# Altium PCB tank_adapter.PcbDoc
Units mil, origin at the board's own origin, x right, y up, seen from the top; angles counter-clockwise.
Board outline 3730 x 2775 mil, 2 copper layers (Top Layer, Bottom Layer); 34 components, 32 nets, 171 pads, 9 vias.
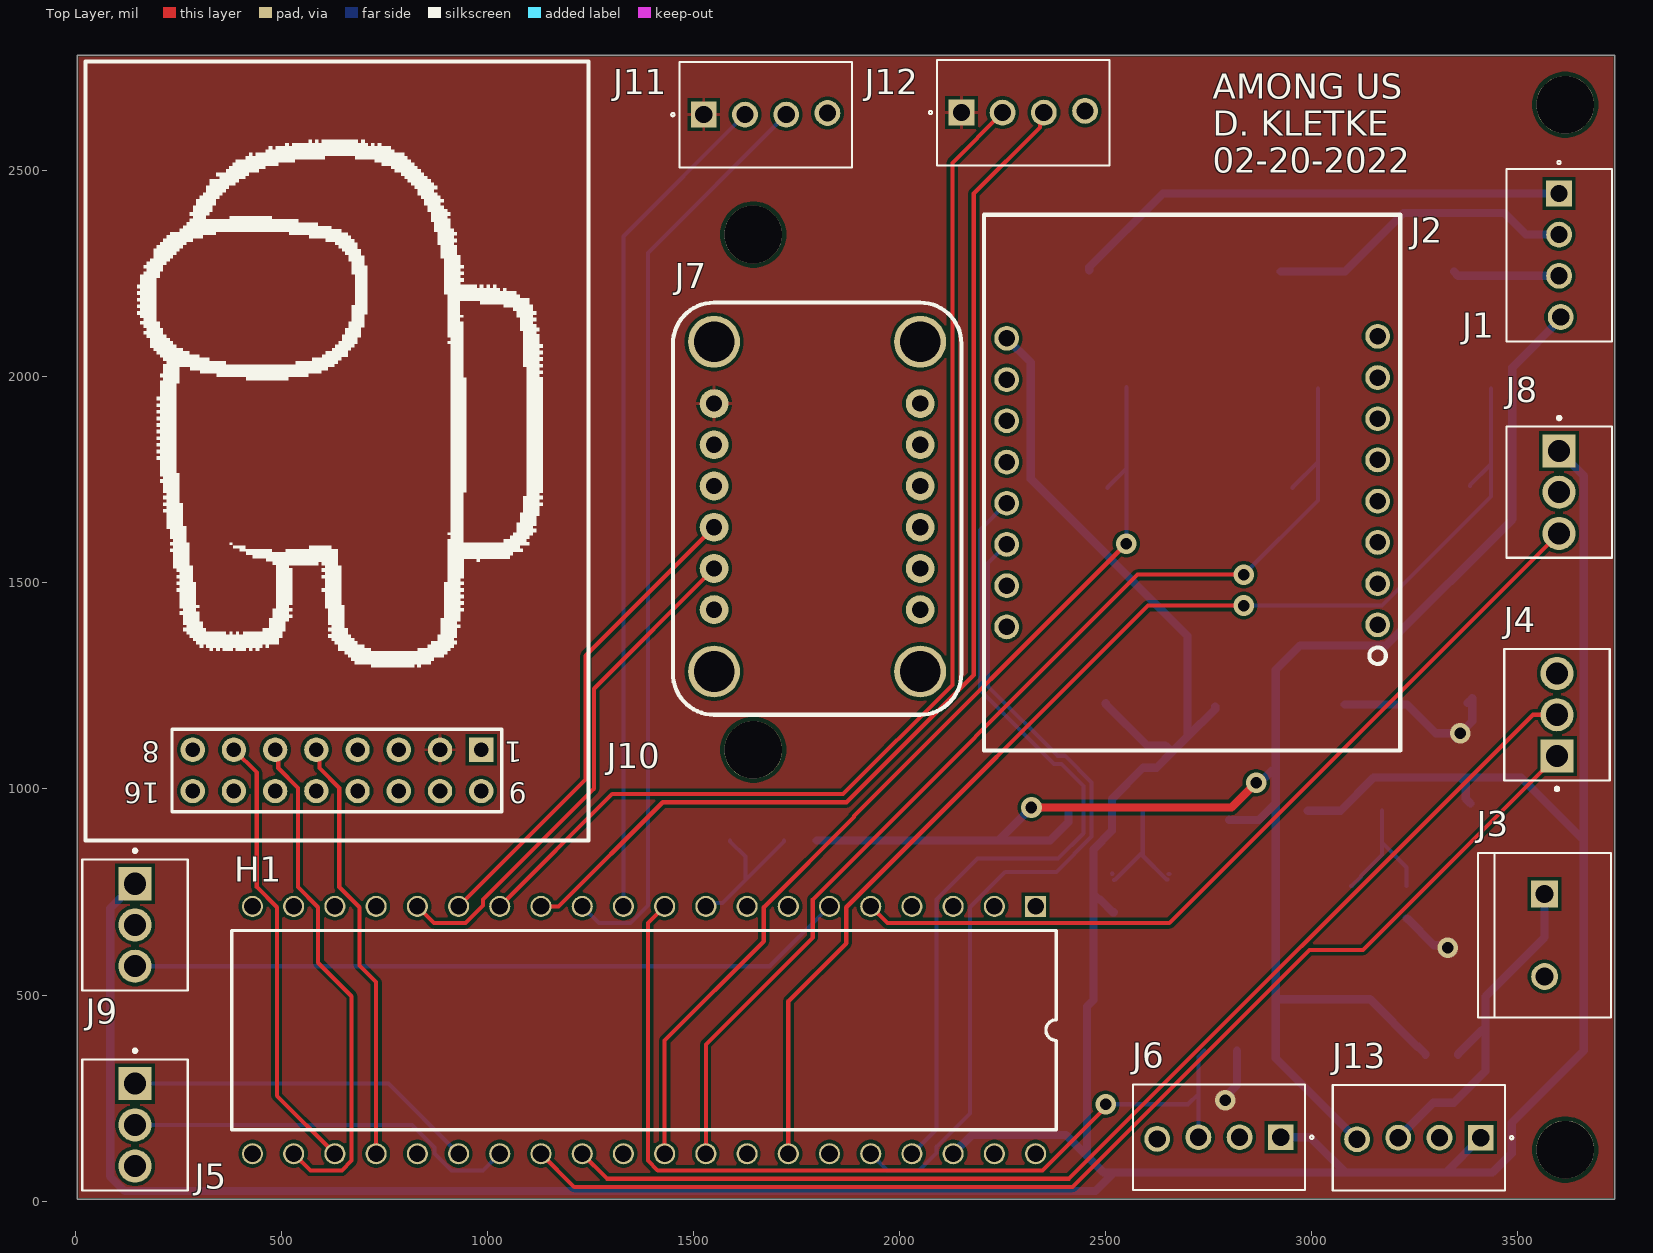
[diagram p0: Top Layer view]
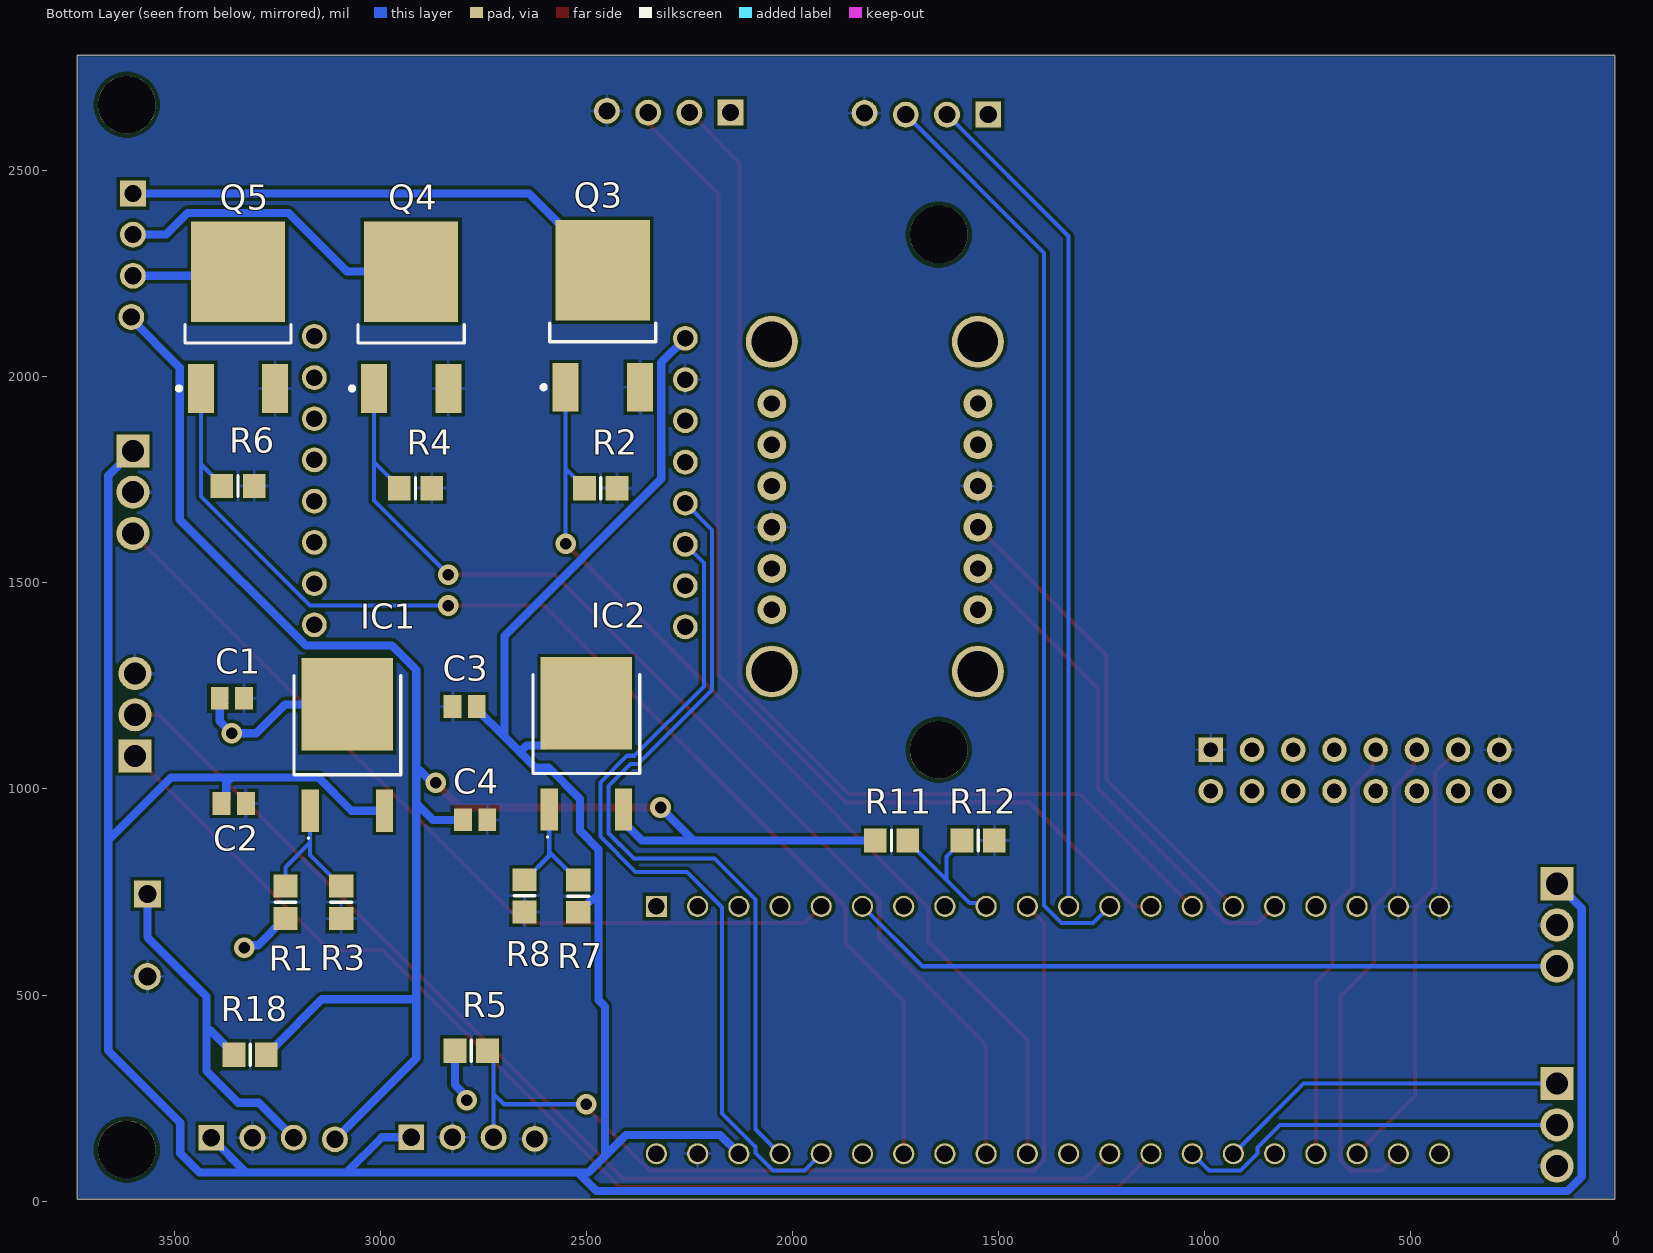
[diagram p1: Bottom Layer view, seen from below]

## Layer stack, top to bottom
Top Solder: solder mask 0.4, Solder Resist, Dk 3.5
Top Layer: signal copper 1.4
Dielectric 1: dielectric 12.6, FR-4, Dk 4.8
Bottom Layer: signal copper 1.4
Bottom Solder: solder mask 0.4, Solder Resist, Dk 3.5

## Board outline
5,5 3735,5 3735,2780 5,2780

## Design rules (kind name [scope] priority, off if disabled: settings)
BoardOutlineClearance [All] p1: gap=7.87 ignorepadtopadclearanceinfootprint=FALSE
Clearance [All] p1: gap=8 ignorepadtopadclearanceinfootprint=FALSE except(9.84: Arc-Hole Track-Hole SMDPad-Hole THPad-Hole Via-Hole Fill-Hole Poly-Hole Region-Hole Text-Hole)
ComponentClearance [All] p1: gap=5 collisioncheckmode=3 verticalgap=5 showdistances=TRUE
DiffPairsRouting [All] p1: maxlimit=15 minlimit=8 mostfreqgap=8 toplayer_minwidth=8 toplayer_maxwidth=1000 toplayer_prefwidth=8 bottomlayer_minwidth=8 bottomlayer_maxwidth=1000 bottomlayer_prefwidth=8 maxuncoupledlength=500
Height [All] p1: minheight=0 maxheight=71497.94 prefheight=500
HoleSize [All] p1: absolutevalues=TRUE maxlimit=248.03 minlimit=11.81 maxpercent=80.000 minpercent=20.000
HoleToHoleClearance [All] p1: gap=9.84 allowstackedmicrovias=FALSE
MinimumAnnularRing [All] p1: minimumring=3
MinimumSolderMaskSliver [All] p1: minsoldermaskwidth=0
PlaneClearance [All] p1: clearance=8
PlaneConnect PlaneConnectPowerPads [InPadClass('PowerPads')] p1: planeconnectstyle=Direct reliefexpansion=20 reliefentries=4 reliefconductorwidth=10 reliefairgap=10
PlaneConnect [All] p2: pad.planeconnectstyle=Relief pad.reliefexpansion=11.81 pad.reliefentries=4 pad.reliefconductorwidth=8 pad.reliefairgap=8 via.planeconnectstyle=Direct via.reliefexpansion=11.81 via.reliefentries=4 via.reliefconductorwidth=5 via.reliefairgap=5
PolygonConnect PolygonConnectPowerPads [All vs (InPadClass('PowerPads'))] p1: connectstyle=Direct reliefconductorwidth=10 reliefentries=4 polygonreliefangle="90 Angle" airgapwidth=10
PolygonConnect [All] p2: thpad.connectstyle=Relief thpad.reliefconductorwidth=8 thpad.reliefentries=4 thpad.polygonreliefangle="90 Angle" thpad.airgapwidth=8 smdpad.connectstyle=Relief smdpad.reliefconductorwidth=8 smdpad.reliefentries=4 smdpad.polygonreliefangle="90 Angle" smdpad.airgapwidth=8 via.connectstyle=Direct via.reliefconductorwidth=5 via.reliefentries=4 via.polygonreliefangle="90 Angle" via.airgapwidth=5
RoutingVias [All] p1: holewidth=11.81 width=23.62 viastyle="Through Hole" minholewidth=11.81 minwidth=23.62 maxholewidth=23.62 maxwidth=259.84
SilkToSilkClearance [All] p1: silktosilkclearance=0
SilkToSolderMaskClearance [IsPad] p1: minsilkscreentomaskgap=5 clearancetoexposedcopper=TRUE
SolderMaskExpansion [All] p1: expansion=2.95 istentingtop=FALSE
Width [All] p1: maxlimit=1000 minlimit=8 preferedwidth=8 minimp=50.000000 maximp=50.000000 favimp=50.000000
20 further rules are at their usual default settings.

## Classes and differential pairs
component class tank_adapter: H1 J1 J2 J3 J4 J5 J6 J7 J8 J9 J10 J11 J12 J13 Q3 Q4 Q5 R2 R4 R5 R6 R18
component class tank_adapter_power: C1 C2 C3 C4 IC1 IC2 R1 R3 R7 R8 R11 R12

## Components (designator, comment, footprint, x,y, rotation, side; value= is the part's Value field where it differs from the comment)
C1 "Cap" C0805 3360,1220 r0 bottom value=22uF
C2 "Cap" C0805 3355.47,965 r0 bottom value=10uF
C3 "Cap" C0805 2795.47,1200 r180 bottom value=22uF
C4 "Cap" C0805 2770,925 r0 bottom value=10uF
H1 "STM32 Bluepill" "STM32 Bluepill" 2330,715 r270 top
IC1 "AZ1084CD-ADJTRG1" AZ1084CDADJTRG1 3080,1110.91 r180 bottom
IC2 "AZ1084CD-ADJTRG1" AZ1084CDADJTRG1 2500,1113.78 r180 bottom
J1 "LEDs" HDRV4W85P254_4X1_1062X650X1000 3600,2445 r270 top
J2 "ESP8266MOD D1 MINI" "ESP8266MOD D1 MINI" 3159.84,1398.23 r180 top
J3 "LiPo Battery" TE_282837-2 3565,645 r270 top
J4 "Motor Encoder LEFT" TE_282834-3 3595,1080 r90 top
J5 "Motor Encoder RIGHT" TE_282834-3 145,285 r270 top
J6 "Programming Switch" HDRV4W85P254_4X1_1062X650X1000 2925,155 r180 top
J7 "ICM-20948 Breakout 2x6 Pin Header" "ICM20948 Breakout" 1993,2180 r270 top
J8 "Motor ESC LEFT" TE_282834-3 3600,1820 r270 top
J9 "Motor ESC RIGHT" TE_282834-3 145,770 r270 top
J10 "LC Studio" HDR2X8_CEN 985,1095 r180 top locked
J11 "HC-SR04 Ultrasonic Sensor FRONT" HDRV4W85P254_4X1_1062X650X1000 1525,2636.06 r0 top
J12 "HC-SR04 Ultrasonic Sensor SIDE" HDRV4W85P254_4X1_1062X650X1000 2150,2641.06 r0 top
J13 "Power Switch" HDRV4W85P254_4X1_1062X650X1000 3410,153.94 r180 top
Q3 "NTD14N03RT4G" ONSC-DPAK-3-369C-01_V 2460.16,2147.99 r90 bottom
Q4 "NTD14N03RT4G" ONSC-DPAK-3-369C-01_V 2925,2145 r90 bottom
Q5 "NTD14N03RT4G" ONSC-DPAK-3-369C-01_V 3345,2145 r90 bottom
R1 "Res1" 6-0805_M 3230,725 r270 bottom value=150
R2 "Res1" 6-0805_M 2465,1730 r180 bottom value=10k
R3 "Res1" 6-0805_M 3095,725 r90 bottom value=250
R4 "Res1" 6-0805_M 2914.37,1730 r180 bottom value=10k
R5 "Res1" 6-0805_M 2779.37,365 r180 bottom value=10k
R6 "Res1" 6-0805_M 3345,1735 r180 bottom value=10k
R7 "Res1" 6-0805_M 2520,740 r270 bottom value=150
R8 "Res1" 6-0805_M 2650,740.63 r90 bottom value=450
R11 "Res1" 6-0805_M 1759.37,875 r0 bottom value=150k
R12 "Res1" 6-0805_M 1549.37,875 r0 bottom value=50k
R18 "Res1" 6-0805_M 3315.63,355 r180 bottom value=0

## Footprints (in the part's own frame and the unit in brackets; to place one, negate y for a bottom-side part, rotate by r counter-clockwise, add the part's x,y. Pads: shape width x height; smd on the part's side, far side on the other; paste and mask are expansions set on the pad)
6-0805_M [mm] "Chip Resistor, Body 2.0x1.2mm, IPC Low Density"
  rect 1.4x1.5 smd: 1(-1,0) 2(1,0)
  silkscreen extent 0,-0.65 0,0.65, body extent -1.07,-0.7 1.07,0.7, height 0.7
AZ1084CDADJTRG1 [mm]
  rect 1.06x2.6 smd: 1(-2.286,-4.16) 3(2.286,-4.16)
  rect 5.632x5.7 smd: 2(0,2.39)
  silkscreen extent -3.29,-5.9 3.29,4.16
C0805 [mm] "Chip Capacitor, Body 2.0x1.3mm, IPC High Density"
  rect 1.1x1.4 smd: 1(-0.75,0) 2(0.75,0)
  body extent -1.1,-0.72 1.1,0.72, height 1.4
"ESP8266MOD D1 MINI" [mil] "ESP8266MOD D1 MINI Wi-Fi Module"
  round 60 hole 40: 1(0,0) 2(0,-100) 3(0,-200) 4(0,-300) 5(0,-400) 6(0,-500) 7(0,-600) 8(0,-700) 9(900,-695) 10(900,-595) 11(900,-495) 12(900,-395) 13(900,-295) 14(900,-195) 15(900,-95) 16(900,5)
  silkscreen extent -55,-995 955,305
HDR2X8_CEN [mm] "Connector; Header; 8x2 Position"
  rect 1.5x1.5 hole 0.9: 1(0,0)
  round 1.5 hole 0.9: 2(2.54,0) 3(5.08,0) 4(7.62,0) 5(10.16,0) 6(12.7,0) 7(15.24,0) 8(17.78,0) 9(0,2.54) 10(2.54,2.54) 11(5.08,2.54) 12(7.62,2.54) 13(10.16,2.54) 14(12.7,2.54) 15(15.24,2.54) 16(17.78,2.54)
  silkscreen extent -1.27,-1.27 19.05,3.81
HDRV4W85P254_4X1_1062X650X1000 [mm]
  rect 1.59x1.59 hole 1.06: 1(0,0)
  round 1.59 hole 1.06: 2(2.54,0) 3(5.08,0) 4(7.62,0.1)
  silkscreen extent -2,-3.25 9.12,3.25
"ICM20948 Breakout" [mil] "ICM20948 Breakout Footprint"
  round 70 hole 39.37: 1(245,-443) 2(345,-443) 3(445,-443) 4(545,-443) 5(645,-443) 6(745,-443) 7(745,57) 8(645,57) 9(545,57) 10(445,57) 11(345,57) 12(245,57)
  round 125.98 hole 98.43: P$1(95,57) P$1(95,-443) P$1(895,57) P$1(895,-443)
  silkscreen extent 0,-543 1000,157
ONSC-DPAK-3-369C-01_V [mm] "DPAK, 3-Leads, Body 6.54x6.095mm, Pitch 2.29mm"
  rect 3x1.6 smd: 1(-4.4,2.29) 3(-4.4,-2.29)
  rect 6.2x5.8 smd: 4(2.8,0)
  silkscreen extent -4.52,-3.27 -0.45,3.77, body extent -1.6,-3.27 4.49,3.27, height 2.38
"STM32 Bluepill" [mm]
  rect 1.3x1.3 hole 1.02: 1(0,0)
  round 1.3 hole 1.02: 2(0,-2.54) 3(0,-5.08) 4(0,-7.62) 5(0,-10.16) 6(0,-12.7) 7(0,-15.24) 8(0,-17.78) 9(0,-20.32) 10(0,-22.86) 11(0,-25.4) 12(0,-27.94) 13(0,-30.48) 14(0,-33.02) 15(0,-35.56) 16(0,-38.1) 17(0,-40.64) 18(0,-43.18) 19(0,-45.72) 20(0,-48.26) 21(15.24,-48.26) 22(15.24,-45.72) 23(15.24,-43.18) 24(15.24,-40.64) 25(15.24,-38.1) 26(15.24,-35.56) 27(15.24,-33.02) 28(15.24,-30.48) 29(15.24,-27.94) 30(15.24,-25.4) 31(15.24,-22.86) 32(15.24,-20.32) 33(15.24,-17.78) 34(15.24,-15.24) 35(15.24,-12.7) 36(15.24,-10.16) 37(15.24,-7.62) 38(15.24,-5.08) 39(15.24,-2.54) 40(15.24,0)
  silkscreen extent 1.48,-49.53 13.76,1.27
TE_282834-3 [mm]
  rect 2.04x2.04 hole 1.36: 1(0,0)
  round 2.04 hole 1.36: 2(2.54,0) 3(5.08,0)
  silkscreen extent -2.13,-3.25 6.58,3.25, body extent -1.5,-3.2 6.58,3.3, height 7
TE_282837-2 [mm]
  rect 1.65x1.65 hole 1.1: 1(-2.54,0)
  round 1.65 hole 1.1: 2(2.54,0)
  silkscreen extent -5.08,-4.1 5.08,4.1, body extent -5.33,-3.88 5.43,4.32, height 7.25

## Part data
C1 C2 C3 C4: "Capacitor", LatestRevisionDate=17-Jul-2002, LatestRevisionNote="Re-released for DXP Platform.", PackageDescription="Radial Cap, Thru-Hole; 2 Leads; 0.3 in Pin Spacing", PackageReference=RAD-0.3, Published=8-Jun-2000, Publisher="Altium Limited"
IC1 IC2: "Integrated Circuit", Manufacturer_Name="Diodes Inc.", Mouser2 Part Number=621-AZ1084CD-ADJTRG1, Datasheet Link=https://componentsearchengine.com//AZ1084CD-ADJTRG1.pdf, Height=2.39mm, Manufacturer_Part_Number=AZ1084CD-ADJTRG1, Mouser2 Price/Stock=https://www.mouser.com/Search/Refine.aspx?Keyword=621-AZ1084CD-ADJTRG1
J1 J6 J11 J12 J13: library part 282834-4, "4 Position Wire to Board Terminal Block Horizontal with Board 0.100 _2.54mm_ Through Hole", Package=None, Availability=Unavailable, Centerline_Pitch="2.54 mm[.1 in]", EU_RoHS_Compliance="Compliant with Exemptions", MF="TE Connectivity", MP=282834-4, Number_of_Positions=4, Price=None, SnapEDA_Link=https://www.snapeda.com/parts/282834-4/TE%20Connectivity%20AMP%20Connectors/view-part/448422/?ref=snap, TE_purchase_URL=https://www.te.com/usa-en/product-282834-4.html?te_bu=Cor&te_type=disp&te_campaign=seda_glo_cor-seda-global-disp-prtnr-fy19-seda-model-bom-cta_sma-317_1&elqCampaignId=32493
J3: library part 282837-2, "Connector Terminal Blocks Receptacle 2 Position 5.08mm Solder Straight Thru-Hole 13.5A/Contact", Package=None, Availability=Good, Check_prices=https://www.snapeda.com/parts/282837-2/TE%20Connectivity%20AMP%20Connectors/view-part/2549980/?ref=eda, MF="TE Connectivity", MP=282837-2, Price=None, Purchase-URL=https://pricing.snapeda.com/search/part/282837-2/?ref=eda, SnapEDA_Link=https://www.snapeda.com/parts/282837-2/TE%20Connectivity%20AMP%20Connectors/view-part/2549980/?ref=snap
J4 J5 J8 J9: library part 282834-3, "3 Position Wire to Board Terminal Block Horizontal with Board 0.100 (2.54mm)", Package=None, Availability=Good, Check_prices=https://www.snapeda.com/parts/282834-3/TE%20Connectivity%20AMP%20Connectors/view-part/398089/?ref=eda, EU_RoHS_Compliance="Compliant with Exemptions", MF="TE Connectivity", MP=282834-3, Price=None, Purchase-URL=https://pricing.snapeda.com/search/part/282834-3/?ref=eda, SnapEDA_Link=https://www.snapeda.com/parts/282834-3/TE%20Connectivity%20AMP%20Connectors/view-part/398089/?ref=snap
J7: "THT Vertical Pin Header WR-PHD, Pitch 2.54 mm, Double Row, 2x6 pins"
J10: library part "Header 8X2A", "Header, 8-Pin, Dual row", LatestRevisionDate=17-Jul-2002, LatestRevisionNote="Re-released for DXP Platform.", Publisher="Altium Limited"
Q3 Q4 Q5: library part CMP-1058-00361-1, "Power MOSFET, 14 A, 25 V, N-Channel, 3-Pin DPAK, Pb-Free, Tape and Reel", Manufacturer="On Semiconductor", Package Type=DPAK-3, Channel Polarity="N Channel", Ciss Typ (pF)=115, ComponentLink1Description="Manufacturer URL", ComponentLink1URL=http://www.onsemi.com/, ComponentLink2Description=Datasheet, ComponentLink2URL=http://www.onsemi.cn/pub_link/Collateral/NTD14N03R-D.PDF, ComponentLink3Description="Package Specification", ComponentLink3URL=http://www.onsemi.cn/pub_link/Collateral/369C.PDF, Configuration=Single, Coss Typ (pF)=62, Crss Typ (pF)=33, DatasheetVersion="Rev. 7", Mounting Technology="Surface Mount", PackageDescription="3-Pin Flange Mount, Body 6.54 x 6.095 mm, Pitch 2.29 mm", PackageReference=DPAK-3-369C-01, PackageVersion="Rev. E, 02/2014", Packing="Tape and Reel", PartNumber=NTD14N03RT4G, Qrr Typ (nC)=2, RoHS=Pb-Free, V(BR)DSS Min (V)=25, VGS Max (V)=20, VGS(th) Max (V)=2
R1 R2 R3 R4 R5 R6 R7 R8 R11 R12 R18: "Resistor", LatestRevisionDate=17-Jul-2002, LatestRevisionNote="Re-released for DXP Platform.", PackageDescription="Axial Device, Thru-Hole; 2 Leads; 0.3 in Pin Spacing", PackageReference=AXIAL-0.3, Published=8-Jun-2000, Publisher="Altium Limited"

## Free pads (board coordinates)
  round 140 hole 140: 4(1645,1095) 4(1645,2345) 4(3615,125) 4(3615,2660)

## Via types
v1: diameter 50, hole 28, Top Layer to Bottom Layer, 9 vias

## Nets (pads, with @x,y where several pads share a name; then routed paths per layer and width w, separated by ;. In a path a pad name is that pad's centre, name@x,y a point inside that pad or via, vN(x,y) a via of type N, cw(c..) or ccw(c..) an arc to the next point about the centre after c; other vN are vias at no path point)
+3.3V: C1.2 IC1.2 J7.1 J10.2 J11.1 J12.1 R1.2 R5.1 | length 683.9
  Bottom Layer w20: v1(2790,245) 2790,253.12 2818.74,281.86 R5.1 ; IC1.2 3231.37,1205 3301.37,1135 v1(3360,1135) 3389.53,1164.53 C1.2 C1.2@3377.87,1208.35 ; R1.2 3231.97,685.63 3296.86,620.74 3324.26,620.74 v1(3330,615)
+5V: C2.2 C3.2 H1.38 IC1.3 IC2.2 J2.9 J6.1 J8.1 J9.1 J13.1 R7.2 | length 10251.4
  Bottom Layer w20: J9.1 84.84,709.84 84.84,60.08 120.08,24.84 2475.43,24.84 2520,69.41 ; H1.38 2175.59,160.59 2403.82,160.59 2455,109.41 ; J2.9 2318.5,2034.57 2318.5,1751.76 2698.82,1371.44 2698.82,1126.97 ; IC2.2 2500,1206.54 2600.87,1105.67 2644.63,1105.67 2661.07,1089.22 ; R7.2 2518.03,700.63 2486.85,731.81 2482.19,731.81 2470.47,743.53 ; C3.2 2765.94,1194.09 2698.82,1126.97 ; J6.1 2996.3,155 3081.89,69.41 ; IC1.3 3069.67,947.13 3150.1,1027.56 3360.88,1027.56 ; C2.2 3373.35,976.65 3373.35,1015.1 3360.88,1027.56 ; J13.1 3325.47,69.41 ; J8.1 3660.16,1759.84 3660.16,875 ; 2455,109.41 2455,472.21 2470.47,487.68 2470.47,743.53 ; 2455,109.41 2495,69.41 2520,69.41 ; 2470.47,743.53 2470.47,853.57 2515.66,898.76 2515.66,975.99 2591.15,1051.48 2623.33,1051.48 2661.07,1089.22 ; 2520,69.41 3081.89,69.41 ; 2661.07,1089.22 2698.82,1126.97 ; 3081.89,69.41 3325.47,69.41 ; 3325.47,69.41 3438.76,69.41 3485,115.65 3485,190 3660.16,365.16 3660.16,875 ; 3360.88,1027.56 3507.6,1027.56 3660.16,875
"+12V UNREG": J3.1 J13.3 R18.1 | length 867.1
  Bottom Layer w10: R18.1 R18.1@3360,360
  Bottom Layer w20: J13.3 3294.86,238.8 3344.86,238.8 3421.58,315.51 3421.58,415 ; R18.1 3355,356.97 3413.03,415 3421.58,415 ; J3.1 3565,640 3421.58,496.58 3421.58,415
"ADJ INPUT 3.3V": IC1.1 R1.1 R3.2 | length 345.5
  Bottom Layer w10: R3.2 3096.97,764.37 3119.53,786.93 3119.53,788.9 3170,839.37 3170,870 ; IC1.1 3170,870 ; R1.1 3230,810 3170,870
"ADJ INPUT 5V": IC2.1 R7.1 R8.2 | length 298.1
  Bottom Layer w10: R7.1@2515,794.37 R7.1@2516.97,794.37 ; R7.1 2521.97,779.37 2590,847.4 ; IC2.1 2590,847.4 ; R8.2 2648.03,780 2590,838.03 2590,847.4 ; R8.2@2653.03,793.74 R8.2@2655,793.74
"ENC LEFT CH A": H1.28 J4.1 | length 2931.5
  Top Layer w10: H1.28 1210.59,34.41 2419.41,34.41 2994.51,609.51 3124.51,609.51 J4.1
"ENC LEFT CH B": H1.29 J4.2 | length 2856.3
  Top Layer w10: H1.29 1290.59,54.41 2411.13,54.41 3536.72,1180 J4.2
"ENC RIGHT CH A": H1.26 J5.1 | length 855.4
  Bottom Layer w10: J5.1 760,285 H1.26
"ENC RIGHT CH B": H1.27 J5.2 | length 956.3
  Bottom Layer w10: J5.2 817.4,185 872.02,130.38 872.02,115.57 913.19,74.41 989.41,74.41 H1.27
"ESC LEFT COMM": H1.5 J8.3 | length 2078.5
  Top Layer w10: H1.5 1970.59,674.41 2654.41,674.41 J8.3
"ESC RIGHT COMM": H1.6 J9.3 | length 1745.1
  Bottom Layer w10: J9.3 1685,570 H1.6
"ESP I2C SCL": H1.36 J2.14 | length 2031.8
  Bottom Layer w10: H1.36 1970.59,74.41 2046.81,74.41 2089.41,117.01 2089.41,131.81 2170.59,212.99 2170.59,712.99 2256.25,798.66 2380.2,798.66 2465.87,884.32 2465.87,1015.68 2400.88,1080.67 2382.92,1080.67 2214.84,1248.75 2214.84,1548.23 J2.14
"ESP I2C SDA": H1.37 J2.13 | length 2006.5
  Bottom Layer w10: H1.37 2089.41,174.41 2089.41,731.81 2189.1,831.5 2384.76,831.5 2445.87,892.61 2445.87,1007.39 2392.59,1060.67 2374.64,1060.67 2194.84,1240.46 2194.84,1628.23 J2.13
GND: C1.1 C2.1 C3.1 C4.1 H1.19 H1.20 H1.39 J2.10 J3.2 J4.3 J5.3 J6.2 J6.4 J7.3 J7.9 J8.2 J9.2 J10.1 J10.8 J11.4 J12.4 J13.2 Q3.3 Q4.3 Q5.3 R2.2 R3.1 R4.2 R6.2 R8.1 R12.1
"IMU I2C SCL": H1.15 J7.4 | length 1176.8
  Top Layer w10: H1.15 1238.2,1023.2 1238.2,1323.2 J7.4
"IMU I2C SDA": H1.16 J7.5 | length 1244.1
  Top Layer w10: H1.16 870.59,674.41 946.81,674.41 989.41,717.01 989.41,731.81 1258.2,1000.6 1258.2,1243.2 J7.5
"LED BLUE CONN": J1.3 Q5.4 | length 264.2
  Bottom Layer w20: Q5.4 3355.24,2245 J1.3@3605,2245
"LED BLUE MCU": H1.34 Q5.1 R6.1 | length 2969.4
  Top Layer w10: H1.34 1730,485 1870.59,625.59 1870.59,712.99 2602.6,1445 v1(2835,1445)
  Bottom Layer w10: v1(2835,1445) 3170.25,1445 3435.16,1709.9 3435.16,1787.76 ; R6.1 3384.37,1736.97 3435.16,1787.76 ; Q5.1 3435.16,1787.76
"LED GREEN CONN": J1.2 Q4.4 | length 760.5
  Bottom Layer w20: Q4.4 3080.5,2255.24 3222.54,2397.28 3467.46,2397.28 3519.74,2345 J1.2@3605,2345
"LED GREEN MCU": H1.32 Q4.1 R4.1 | length 2711.6
  Top Layer w10: H1.32 1530,380 1789.41,639.41 1789.41,731.81 2577.6,1520 v1(2835,1520)
  Bottom Layer w10: v1(2835,1520) 3015.16,1700.16 3015.16,1793.39 ; R4.1 2953.74,1731.97 3015.16,1793.39 ; Q4.1 3015.16,1793.39
"LED RED CONN": J1.1 Q3.4 | length 1226.8
  Bottom Layer w20: Q3.4 2460.16,2266.1 2639.06,2445 J1.1@3605,2445
"LED RED MCU": H1.31 Q3.1 R2.1 | length 2390.8
  Top Layer w10: H1.31 1430,390 1670.59,630.59 1670.59,712.99 1889.41,931.81 1889.41,934.41 v1(2550,1595)
  Bottom Layer w10: R2.1 2504.37,1731.97 2550.31,1777.91 ; v1(2550,1595) 2550.31,1595.32 2550.31,1777.91 ; Q3.1 2550.31,1777.91
NetC4_2: C4.2 IC2.3 J1.4 J13.4 R11.2 R18.2 | length 4448.8
  Top Layer w20: v1(2320,955) 2805,955 v1(2865,1015)
  Bottom Layer w10: C4.2 C4.2@2799.53,930.91 ; R18.2@3276.26,353.03 R18.2
  Bottom Layer w20: R11.2 2240,875 ; v1(2320,955) 2240,875 ; IC2.3 2410,919.69 2365.31,875 2240,875 ; C4.2 2872.44,925 2912.44,965 ; v1(2865,1015) 2873.12,1015 2903.12,1045 2912.44,1045 ; J13.4 2912.44,347.56 2912.44,490 ; R18.2 3276.26,356.97 3258.7,374.53 3256.73,374.53 3141.26,490 2912.44,490 ; J1.4@3608.94,2145 3486.65,2022.72 3486.65,1654.33 3180.55,1348.23 2971.87,1348.23 2912.44,1288.8 2912.44,1045 ; 2912.44,490 2912.44,965 ; 2912.44,965 2912.44,1045
NetH1_9: H1.9 R11.1 R12.2 | length 368.8
  Bottom Layer w10: H1.9 1537.88,722.88 1569.85,722.88 1625.98,779.02 ; R12.2 1588.74,873.03 1625.98,835.79 1625.98,779.02 ; R11.1 1720,873.03 1625.98,779.02
"SD SPI2 MISO": H1.23 J10.7 | length 1081.5
  Top Layer w10: J10.7 440.47,1039.53 440.47,761.93 489.41,712.99 489.41,255.59 H1.23
"SD SPI2 MOSI": H1.24 J10.5 | length 1040.1
  Top Layer w10: J10.5 592.5,1087.5 592.5,1050.47 640.47,1002.5 640.47,761.93 689.41,712.99 689.41,572.03 730,531.43 H1.24
"SD SPI2 SCK": H1.22 J10.6 | length 1240.9
  Top Layer w10: J10.6 492.5,1087.5 492.5,1050.47 540.47,1002.5 540.47,761.93 589.41,712.99 589.41,578.34 670.59,497.16 670.59,98.19 646.81,74.41 570.59,74.41 H1.22
"SW PROG": H1.10 J6.3 R5.2 | length 2276.5
  Top Layer w10: H1.10 1389.41,674.41 1389.41,98.19 1413.19,74.41 2346.81,74.41 2500,227.6 v1(2500,235)
  Bottom Layer w10: v1(2500,235) 2700,235 2725,260 ; J6.3 2725,260 ; R5.2 2725,350 2725,260
"ULT FRONT ECHO": H1.12 J11.3 | length 2251.9
  Bottom Layer w10: H1.12 1270.59,674.41 1346.81,674.41 1389.41,717.01 1389.41,2300.47 J11.3
"ULT FRONT TRIG": H1.11 J11.2 | length 2043.3
  Bottom Layer w10: H1.11 1330,2341.06 J11.2
"ULT SIDE ECHO": H1.13 J12.3 | length 2717.6
  Top Layer w10: H1.13 1172.6,715 1425.38,967.79 1871.37,967.79 2180,1276.42 2180,2445 2340.29,2605.29 2340.29,2631.36 J12.3
"ULT SIDE TRIG": H1.14 J12.2 | length 2759.6
  Top Layer w10: H1.14 1302.79,987.79 1863.08,987.79 2127.99,1252.7 2127.99,2519.05 J12.2
pads on no net: H1.1 H1.2 H1.3 H1.4 H1.7 H1.8 H1.17 H1.18 H1.21 H1.25 H1.30 H1.33 H1.35 H1.40 J2.1 J2.2 J2.3 J2.4 J2.5 J2.6 J2.7 J2.8 J2.11 J2.12 J2.15 J2.16 J7.2 J7.6 J7.7 J7.8 J7.10 J7.11 J7.12 J7.P$1 J10.3 J10.4 J10.9 J10.10 J10.11 J10.12 J10.13 J10.14 J10.15 J10.16

## Polygon pours and split planes (outlines as drawn)
+3.3V on Top Layer "+3.3V_L01_P000" (solid, pour order 0): -5,2790 -5,-5 3745,-5 3745,2790
GND on Bottom Layer "GND_L02_P002" (solid, pour order 2): -7.07,2785.12 -7.07,-4.88 -2.07,-9.88 3742.93,-9.88 3742.93,2785.12

## Silkscreen, mask and mechanical layers (free items; w line width, h text height)
Top Overlay:
  drawing of 6 lines, arcs and shapes, not listed
  text "AMONG US / D. KLETKE / 02-20-2022" at 2760,2495 h60
Mechanical 1:
  the board outline again, w5

## Dimensions
1645,1095 to 1790,-5 on Dimensions
1645,1095 to -5,1060 on Dimensions
1645,2345 to -5,2390 on Dimensions
1645,2345 to 1965,2790 on Dimensions
3615,125 to 3660,-5 on Dimensions
3615,125 to 3745,110 on Dimensions
3615,2660 to 3745,2695 on Dimensions
3615,2660 to 3620,2790 on Dimensions
0,-5 to 5,2780 on Dimensions
5,2780 to 3735,2780 on Dimensions

## Text inside footprints (layer, text, board x,y; h text height)
J10: Top Overlay "16" at 205,1015 h50 r180; Top Overlay "8" at 205,1115 h50 r180; Top Overlay "1" at 1085,1115 h50 r180; Top Overlay "9" at 1095,1015 h50 r180